# EAGLE board CDCEmu_Logic_v2.0 (EAGLE 9.6.2)
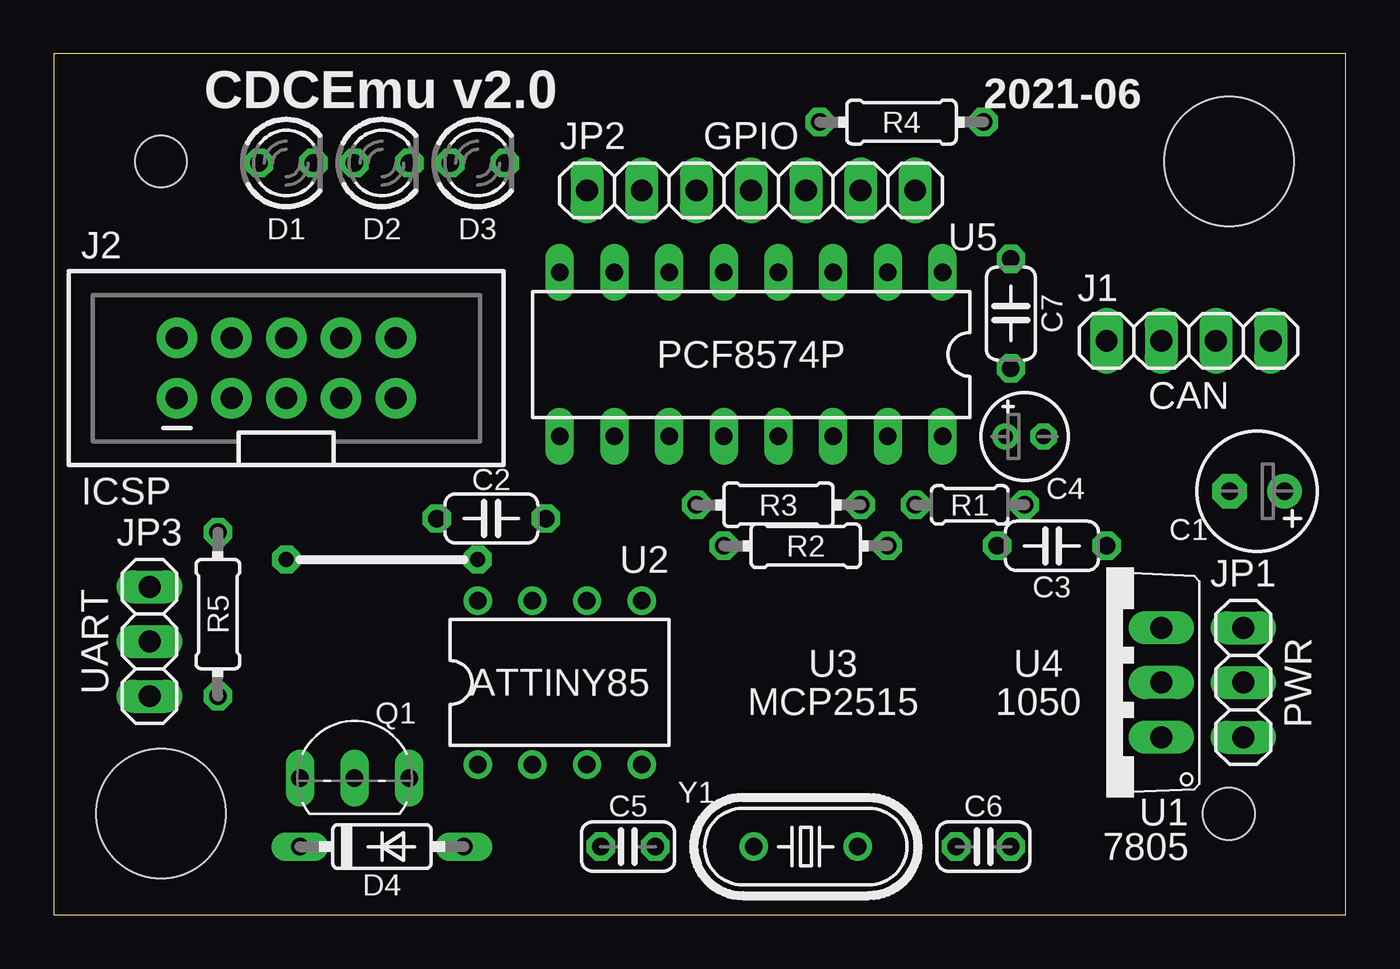
[diagram p0: board, top side]
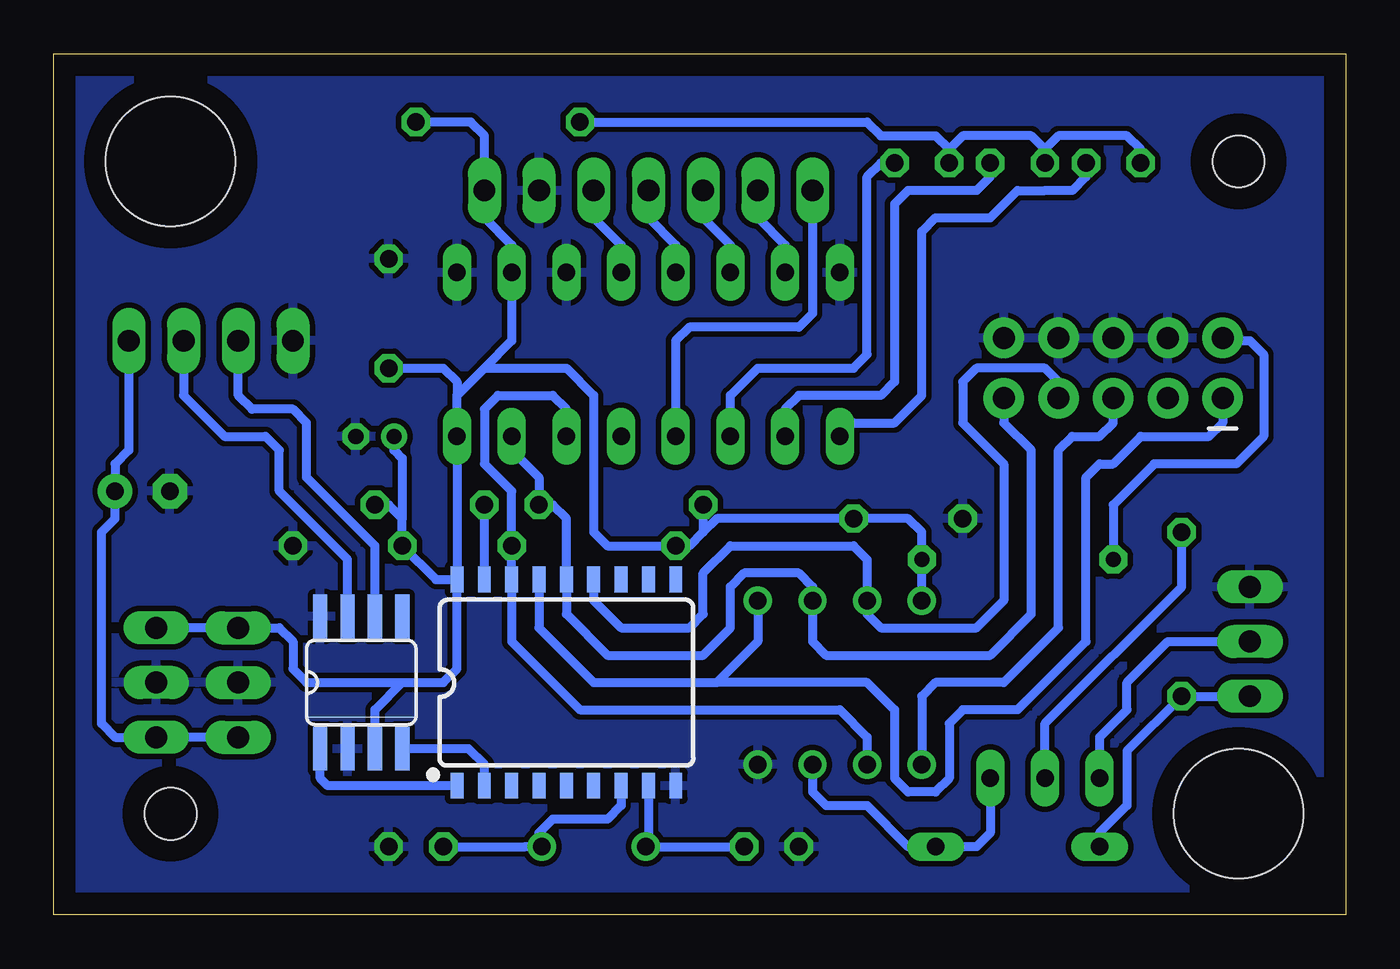
[diagram p1: board, bottom side, seen from below]

Size 60 x 40 mm. Coordinates in mm from the lower left corner, seen from the top.
Outline: 0,0 60,0 60,40 0,40 0,0
Copper layers (1*16): Top 0.035mm / dielectric 1.5mm / Bottom 0.035mm
Design rules "default": minimum track width 6mil, minimum drill 0.35mm, track to track 6mil, track to pad 6mil, pad to pad 6mil, via to via 6mil, smd to smd 6mil, copper to edge 40mil, drill to drill 6mil, minimum pad ring 10mil, minimum via ring 8mil, stop-mask expansion 4mil, vias tented up to drill 0mil, thermal gap 10mil
Holes 6 mm at 4.97,4.7 54.58,35
Holes 2.4 mm at 4.97,35 54.58,4.7

## Footprints (pad centres in the part's own frame; a part is rotated, then mirrored left to right if it is on the bottom)
E2,5-6 = drill 0.813 pad 1.6: + -1.27,0 | drill 0.813 pad 1.6 octagon: - 1.27,0
C050-024X044 = drill 0.813 octagon: 1 -2.54,0; 2 2.54,0
E1,8-4 = drill 0.711 pad 1.168: + -0.889,0 | drill 0.711 pad 1.168 octagon: - 0.889,0
C025-024X044 = drill 0.813 octagon: 1 -1.27,0; 2 1.27,0
LED3MM = drill 0.813 octagon: A -1.27,0; K 1.27,0
DO35-7 = drill 0.813 long: A 3.81,0; C -3.81,0
1X04 = drill 1.016 long: 1 -3.81,0; 2 -1.27,0; 3 1.27,0; 4 3.81,0
2X5-SHROUDED_LOCK = drill 1.016 pad 1.88: 1 -1.397,5.08; 2 1.397,5.08; 3 -1.397,2.54; 4 1.397,2.54; 5 -1.397,0; 6 1.397,0; 7 -1.397,-2.54; 8 1.397,-2.54; 9 -1.397,-5.08; 10 1.397,-5.08
1X03 = drill 1.016 long: 1 -2.54,0; 2 0,0; 3 2.54,0
1X07 = drill 1.016 long: 1 -7.62,0; 2 -5.08,0; 3 -2.54,0; 4 0,0; 5 2.54,0; 6 5.08,0; 7 7.62,0
TO92-EBC = drill 0.813 long: B 0,-1.27; C -2.54,-1.27; E 2.54,-1.27
0204/5 = drill 0.813 octagon: 1 -2.54,0; 2 2.54,0
0204/7 = drill 0.813 octagon: 1 -3.81,0; 2 3.81,0
TO220V = drill 1.016 long: 1 -2.54,-2.54; 2 0,-2.54; 3 2.54,-2.54
PDIP08_300MIL = drill 0.813: 1 -3.81,-3.81; 2 -1.27,-3.81; 3 1.27,-3.81; 4 3.81,-3.81; 5 3.81,3.81; 6 1.27,3.81; 7 -1.27,3.81; 8 -3.81,3.81
SO18W = smd 0.6 x 1.2: 1 -5.08,-4.788; 2 -3.81,-4.788; 3 -2.54,-4.788; 4 -1.27,-4.788; 5 0,-4.788; 6 1.27,-4.788; 7 2.54,-4.788; 8 3.81,-4.788; 9 5.08,-4.788; 10 5.08,4.788; 11 3.81,4.788; 12 2.54,4.788; 13 1.27,4.788; 14 0,4.788; 15 -1.27,4.788; 16 -2.54,4.788; 17 -3.81,4.788; 18 -5.08,4.788
SO08 = smd 0.66 x 2.032: 1 -1.905,-3.073; 2 -0.635,-3.073; 3 0.635,-3.073; 4 1.905,-3.073; 5 1.905,3.073; 6 0.635,3.073; 7 -0.635,3.073; 8 -1.905,3.073
DIL16 = drill 0.813 long: 1 -8.89,-3.81; 2 -6.35,-3.81; 3 -3.81,-3.81; 4 -1.27,-3.81; 5 1.27,-3.81; 6 3.81,-3.81; 7 6.35,-3.81; 8 8.89,-3.81; 9 8.89,3.81; 10 6.35,3.81; 11 3.81,3.81; 12 1.27,3.81; 13 -1.27,3.81; 14 -3.81,3.81; 15 -6.35,3.81; 16 -8.89,3.81
HC49U = drill 0.813: 1 -2.413,0; 2 2.413,0

## Placement (x,y rotation side)
C1  100u  [E2,5-6]  55.88,19.68 180 top
C2  100n  [C050-024X044]  20.32,18.41 180 top
C3  100n  [C050-024X044]  46.35,17.14 0 top
C4  10u  [E1,8-4]  45.09,22.23 0 top
C5  47p  [C025-024X044]  26.67,3.17 180 top
C6  47p  [C025-024X044]  43.18,3.17 0 top
C7  100n  [C050-024X044]  44.45,27.94 90 top
D1  [LED3MM]  10.79,34.92 0 top
D2  [LED3MM]  15.24,34.92 0 top
D3  [LED3MM]  19.68,34.92 0 top
D4  1N4148  [DO35-7]  15.24,3.17 0 top
J1  CAN  [1X04]  52.7,26.67 180 top
J2  ICSP  [2X5-SHROUDED_LOCK]  10.79,25.4 90 top
JP1  PWR  [1X03]  55.24,10.79 270 top
JP2  GPIO  [1X07]  32.38,33.66 180 top
JP3  UART  [1X03]  4.45,12.7 270 top
Q1  BC546A  [TO92-EBC]  13.97,7.62 0 top
R1  10k  [0204/5]  42.55,19.05 180 top
R2  2k2  [0204/7]  34.92,17.14 180 top
R3  2k2  [0204/7]  33.66,19.05 180 top
R4  220  [0204/7]  39.37,36.83 0 top
R5  10k  [0204/7]  7.62,13.97 90 top
U1  7805  [TO220V]  48.9,10.79 90 top
U2  ATTINY85  [PDIP08_300MIL]  23.5,10.79 0 top
U3  MCP2515  [SO18W]  36.2,10.79 0 bottom
U4  1050  [SO08]  45.72,10.79 0 bottom
U5  PCF8574P  [DIL16]  32.38,26.04 180 top
Y1  8MHz  [HC49U]  34.92,3.17 0 top

## Library data of the parts
C1-C7 = rcl; SPICEPREFIX: C
D1-D3 = led
D4 = diode
J1 JP1-JP3 = pinhead
J2 = SparkFun-Connectors; PROD_ID: CONN-08671; SF_ID: PRT-08506
Q1 = transistor-npn
R1-R5 = rcl; SPICEPREFIX: R
U1 = linear
U2 = attinyx5
U3 = SparkFun-IC-Comms; PROD_ID: IC-09906
U4 = can_driver
U5 = i2c
Y1 = SparkFun-Clocks

## Nets
+5V: C2.1 C3.1 C4.+ C7.1 J2.2 JP1.1 JP2.1 R1.1 R2.2 R3.2 R4.2 U1.3 U2.8 U3.18 U4.3 U5.2 U5.16
+12V: C1.+ J1.1 JP1.3 U1.1
CANH: J1.2 U4.7
CANL: J1.3 U4.6
CANOSC1: C5.1 U3.8 Y1.1
CANOSC2: C6.1 U3.7 Y1.2
CANRST: R1.2 U3.17
CANRX: U3.2 U4.4
CANTX: U3.1 U4.1
GND: C1.- C2.2 C3.2 C4.- C5.2 C6.2 C7.2 J1.4 J2.4 J2.6 J2.8 J2.10 JP1.2 JP2.2 JP3.1 U1.2 U2.4 U3.9 U4.2 U4.8 U5.1 U5.3 U5.8
LED_A: D1.A D2.A D3.A R4.1
P0: JP2.3 U5.4
P1: JP2.4 U5.5
P2: JP2.5 U5.6
P3: JP2.6 U5.7
P4: D1.K U5.9
P5: D2.K U5.10
P6: D3.K U5.11
P7: JP2.7 U5.12
PB0: J2.1 U2.5 U3.15
PB1: J2.9 R3.1 U2.6 U3.14 U5.15
PB2: J2.7 U2.7 U3.13
PB3: R2.1 U2.2 U3.16 U5.14
PB4: D4.A Q1.E U2.3
RST: J2.5 U2.1
RX: JP3.2 Q1.C
TX: D4.C JP3.3 R5.1
TXB: Q1.B R5.2

## Tracks (layer width: path | path; a pad name or v marks a point on that pad's centre or on a via)
+5V  (via drill 0.7 pad 1.3)
  Top 0.406: v10.79,16.51 v19.68,16.51
  Bottom 0.406: 43.81,10.79 48.26,10.79 48.9,11.43 48.9,12.7 49.53,13.34 U1.3 JP1.1 | U4.3 45.09,9.53 43.81,10.79 | 41.27,24.13 U5.16 U3.18 | 41.27,24.13 40.01,25.4 | 40.01,25.4 36.2,25.4 34.92,24.13 34.92,17.78 34.29,17.14 R2.2 30.48,17.14 29.84,17.78 | 40.01,25.4 38.73,26.67 U5.2 38.73,31.11 40.01,32.38 JP2.1 40.01,36.2 40.64,36.83 R4.2 | 43.81,10.79 41.91,10.79 41.27,11.43 U3.18 | C4.+ 44.2,21.59 43.81,21.21 43.81,18.41 | U3.18 42.25,15.58 C3.1 43.81,18.41 | 43.81,18.41 44.45,19.05 R1.1 | J2.2 5.59,26.67 4.45,26.67 3.81,26.04 3.81,22.23 5.08,20.95 8.89,20.95 10.79,19.05 v10.79,16.51 | C7.1 41.91,25.4 41.27,24.77 41.27,24.13 | U2.8 v19.68,16.51 19.68,17.78 20.32,18.41 C2.1 29.21,18.41 29.84,17.78 | R3.2 29.84,17.78
+12V
  Bottom 0.406: U1.1 JP1.3 57.15,8.26 57.78,8.89 57.78,17.78 57.15,18.41 C1.+ 57.15,20.95 56.52,21.59 J1.1
CANH
  Bottom 0.406: U4.7 46.35,16.51 49.53,19.68 49.53,21.59 50.16,22.23 52.07,22.23 53.98,24.13 J1.2
CANL
  Bottom 0.406: U4.6 45.09,17.14 48.26,20.32 48.26,22.86 48.9,23.5 50.8,23.5 51.44,24.13 J1.3
CANOSC1
  Bottom 0.406: U3.8 32.38,3.3 Y1.1 C5.1
CANOSC2
  Bottom 0.406: 37.47,3.17 38.1,3.17 C6.1 | U3.7 33.66,5.08 34.29,4.45 36.83,4.45 37.47,3.81 37.47,3.17 | 37.47,3.17 Y1.2
CANRST
  Bottom 0.406: U3.17 R1.2
CANRX
  Bottom 0.406: U3.2 40.01,6.99 40.74,7.72 U4.4
CANTX
  Bottom 0.406: U3.1 47.28,6.01 47.62,6.35 U4.1
GND
  pour Bottom (isolate 0.254): 0,40 0,0 60,0 60,40
  pour Bottom: 3.17,31.7 19.05,31.7 19.05,28.57 3.17,28.57
LED_A
  Bottom 0.406: D1.A 9.53,35.56 10.16,36.2 13.34,36.2 13.97,35.56 | D2.A 13.97,35.56 | 13.97,35.56 14.61,36.2 17.78,36.2 18.41,35.56 | 18.41,35.56 D3.A | 18.41,35.56 19.05,36.2 21.59,36.2 22.23,36.83 R4.1
P0
  Bottom 0.406: U5.4 33.66,31.11 34.92,32.38 JP2.3
P1
  Bottom 0.406: U5.5 31.11,31.11 32.38,32.38 JP2.4
P2
  Bottom 0.406: U5.6 28.57,31.11 29.84,32.38 JP2.5
P3
  Bottom 0.406: U5.7 26.04,31.11 27.3,32.38 JP2.6
P4
  Bottom 0.406: U5.9 22.86,22.86 20.95,22.86 19.68,24.13 19.68,31.75 19.05,32.38 16.51,32.38 15.24,33.66 13.97,33.66 12.7,33.66 12.06,34.29 D1.K
P5
  Bottom 0.406: U5.10 26.04,23.5 25.4,24.13 21.59,24.13 20.95,24.77 20.95,33.02 20.32,33.66 17.14,33.66 16.51,34.29 D2.K
P6
  Bottom 0.406: D3.K 21.59,34.92 22.23,34.29 22.23,26.04 22.86,25.4 27.3,25.4 28.57,24.13 U5.11
P7
  Bottom 0.406: JP2.7 24.77,27.94 25.4,27.3 30.48,27.3 31.11,26.67 U5.12
PB0
  Bottom 0.406: U3.15 37.47,13.34 34.92,10.79 29.21,10.79 | J2.1 5.71,22.86 6.35,22.23 9.53,22.23 10.79,20.95 11.43,20.95 12.06,20.32 12.06,12.7 15.24,9.53 17.78,9.53 18.41,8.89 18.41,6.35 19.05,5.71 20.32,5.71 20.95,6.35 20.95,9.53 22.23,10.79 29.21,10.79 | U2.5 27.3,12.7 29.21,10.79
PB1
  Bottom 0.406: J2.9 15.88,22.86 14.61,21.59 14.61,13.97 16.51,12.06 24.13,12.06 24.77,12.7 U2.6 24.77,15.24 25.4,15.88 27.94,15.88 28.57,15.24 28.57,13.34 29.84,12.06 34.29,12.06 36.2,13.97 U3.14 36.2,18.41 36.83,19.05 R3.1 37.47,20.32 38.73,21.59 U5.15
PB2
  Bottom 0.406: J2.7 13.34,24.77 13.97,25.4 17.14,25.4 17.78,24.77 17.78,22.86 15.88,20.95 15.88,14.61 17.14,13.34 21.59,13.34 22.23,13.97 U2.7 22.23,16.51 22.86,17.14 28.57,17.14 29.84,15.88 29.84,13.97 30.48,13.34 33.66,13.34 34.92,14.61 U3.13
PB3
  Bottom 0.406: U5.14 36.2,23.5 36.83,24.13 39.37,24.13 40.01,23.5 40.01,20.95 38.73,19.68 R2.1 U3.16 38.73,12.7 35.56,9.53 23.5,9.53 22.23,8.26 U2.2
PB4
  Bottom 0.406: U2.3 24.77,5.71 24.13,5.08 22.23,5.08 20.32,3.17 D4.A 17.14,3.17 16.51,3.81 Q1.E
RST
  Bottom 0.406: J2.5 10.79,22.86 11.43,22.23 12.7,22.23 13.34,21.59 13.34,13.34 15.88,10.79 19.05,10.79 19.68,10.16 U2.1
RX
  Bottom 0.406: Q1.C 11.43,8.26 10.16,9.53 10.16,10.79 8.26,12.7 JP3.2
TX
  Bottom 0.406: D4.C 11.43,3.81 10.16,5.08 10.16,7.62 R5.1 JP3.3
TXB
  Bottom 0.406: Q1.B 13.97,8.89 7.62,15.24 R5.2

## Text on the board
tPlace: CDCEmu v2.0 | 2021-06
bRestrict: CDCEmu v2.0